# Altium PCB PCB Editable.PcbDoc
Units mm, origin at the board's own origin, x right, y up, seen from the top; angles counter-clockwise.
Board outline 39 x 29.46 mm, 2 copper layers (Top Layer, Bottom Layer); 24 components, 19 nets, 105 pads, 52 vias.
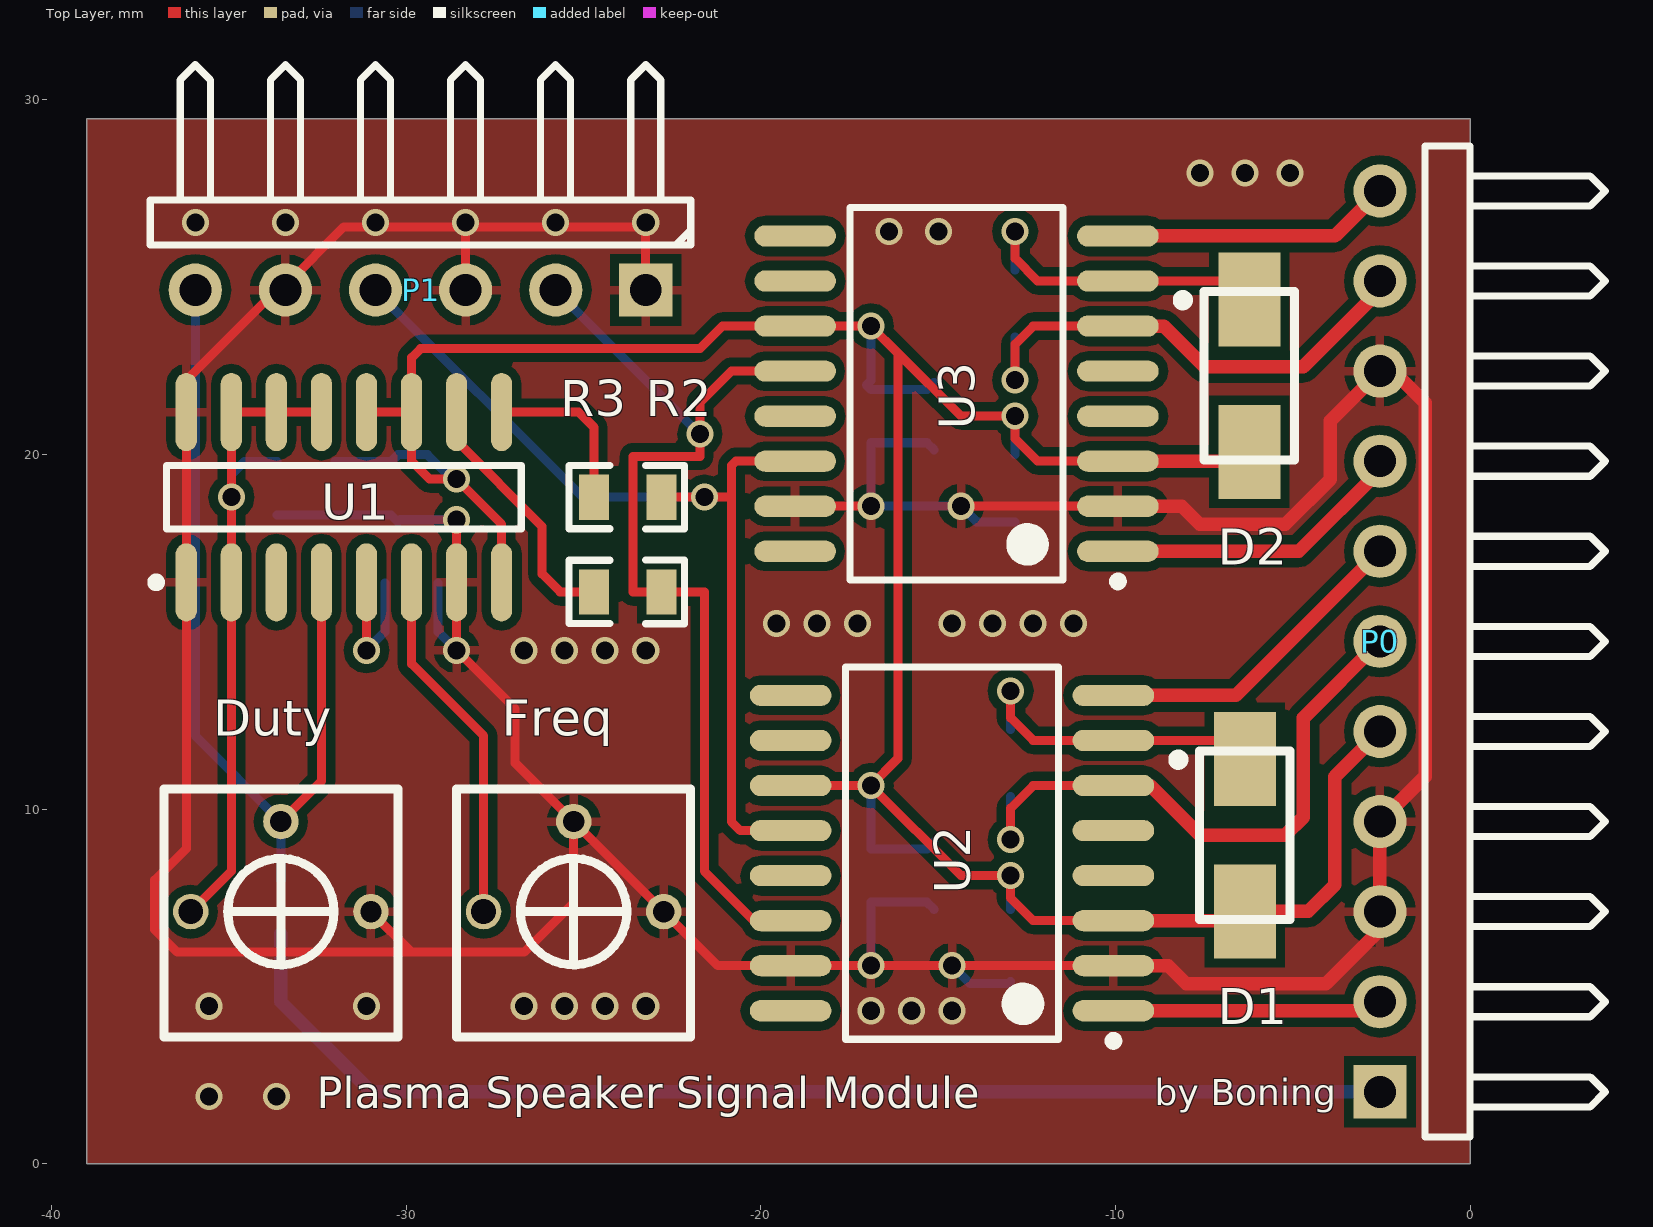
[diagram p0: Top Layer view]
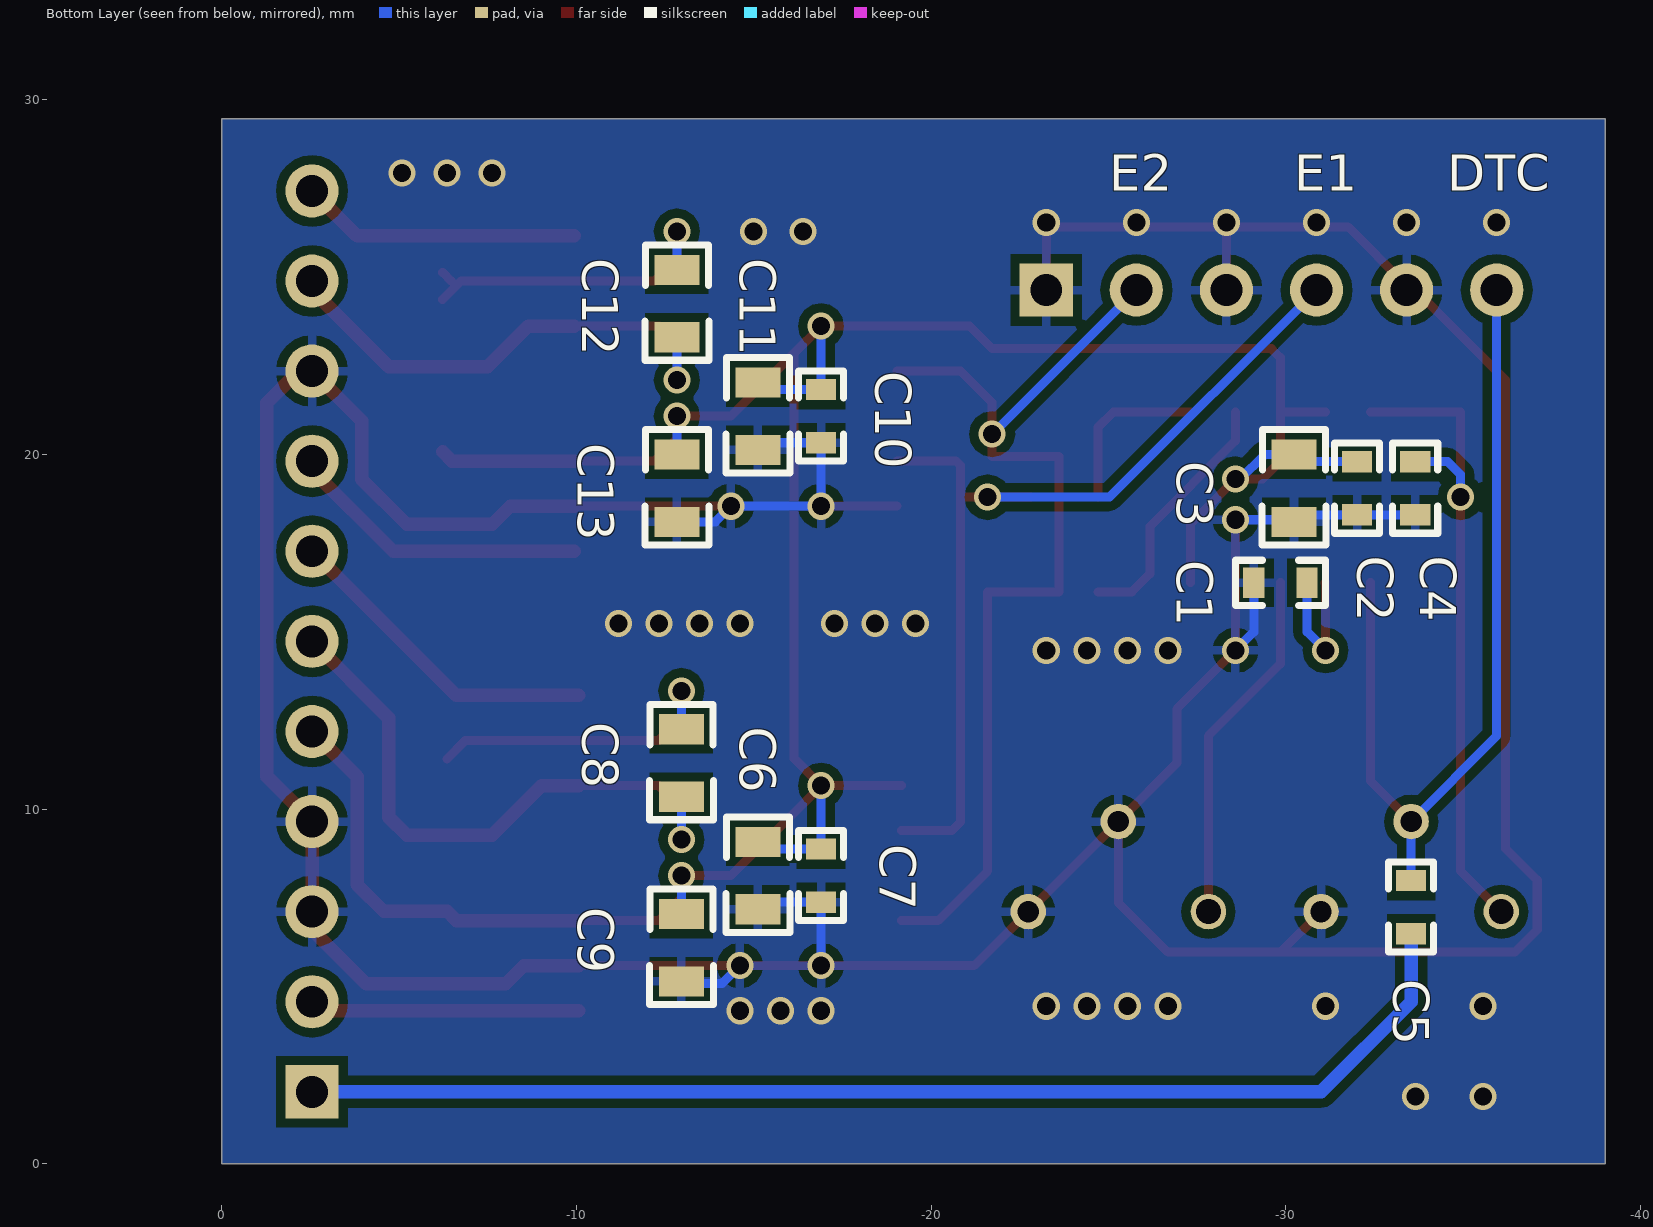
[diagram p1: Bottom Layer view, seen from below]

## Layer stack, top to bottom
Top Solder: solder mask 0.0102, Solder Resist, Dk 3.5
Top Layer: signal copper 0.0356
Dielectric 1: dielectric 0.32, FR-4, Dk 4.8
Bottom Layer: signal copper 0.0356
Bottom Solder: solder mask 0.0102, Solder Resist, Dk 3.5

## Board outline
-39,0 -39,29.464 0,29.464 0,0

## Design rules (kind name [scope] priority, off if disabled: settings)
Clearance [All] p1: gap=0.254
PolygonConnect [All] p1: connectstyle=Relief reliefconductorwidth=0.254 reliefentries=4 polygonreliefangle="90 Angle" airgapwidth=0.254
RoutingVias [All] p1: holewidth=0.711 width=1.27 viastyle="Through Hole" minholewidth=0.711 minwidth=1.27 maxholewidth=0.711 maxwidth=1.27
SolderMaskExpansion [All] p1: expansion=0.102
Width [All] p1: maxlimit=0.762 minlimit=0.254 preferedwidth=0.381
30 further rules are at their usual default settings.

## Components (designator, comment, footprint, x,y, rotation, side; value= is the part's Value field where it differs from the comment)
C1 "0603" D0603 -29.845,16.383 r180 bottom
C2 "0603" D0603 -32.004,19.05 r90 bottom
C3 "0805" D0805 -30.226,19.05 r90 bottom
C4 "0603" D0603 -33.643,19.05 r90 bottom
C5 "0603" D0603 -33.528,7.239 r90 bottom
C6 "0805" D0805 -15.113,8.128 r90 bottom
C7 "0603" D0603 -16.891,8.128 r90 bottom
C8 "0805" D0805 -12.954,11.303 r90 bottom
C9 "0805" D0805 -12.954,6.096 r90 bottom
C10 "0603" D0603 -16.891,21.082 r90 bottom
C11 "0805" D0805 -15.113,21.082 r90 bottom
C12 "0805" D0805 -12.827,24.257 r90 bottom
C13 "0805" D0805 -12.827,19.05 r90 bottom
D1 "Diode S" DO-214 -6.35,9.271 r90 top
D2 "Diode S" DO-214 -6.223,22.225 r90 top
Duty "Res Adj" RES-3362P -33.528,7.112 r0 top
Freq "Res Adj" RES-3362P -25.273,7.112 r0 top
P0 "Header 11H" HDR1X11H -2.54,2.032 r90 top
P1 "Header 6H" HDR1X6H -23.241,24.638 r180 top
R2 "0805" D0805 -23.749,18.796 r180 top
R3 "0805" D0805 -23.749,16.129 r180 top
U1 "TL494CD" 751B-05_N -31.75,18.796 r90 top
U2 "IR2110S" SOIC16_N -14.605,8.763 r180 top
U3 "IR2110S" SOIC16_N -14.478,21.717 r180 top

## Footprints (in the part's own frame and the unit in brackets; to place one, negate y for a bottom-side part, rotate by r counter-clockwise, add the part's x,y. Pads: shape width x height; smd on the part's side, far side on the other; paste and mask are expansions set on the pad)
751B-05_N [mm] "SOIC, 16-Leads, Body 9.9x3.9mm, Pitch 1.27mm, IPC Medium Density"
  oval 2.2x0.6 smd: 1(-2.4,4.445) 2(-2.4,3.175) 3(-2.4,1.905) 4(-2.4,0.635) 5(-2.4,-0.635) 6(-2.4,-1.905) 7(-2.4,-3.175) 8(-2.4,-4.445) 9(2.4,-4.445) 10(2.4,-3.175) 11(2.4,-1.905) 12(2.4,-0.635) 13(2.4,0.635) 14(2.4,1.905) 15(2.4,3.175) 16(2.4,4.445)
  silkscreen extent -2.52,-5 0.9,5.42, body extent -1.95,-4.95 1.95,4.95, height 1.75
D0603 [mm] "D0603"
  rect 0.6x0.85 smd: 1(-0.75,0) 2(0.75,0)
  silkscreen extent -1.27,-0.64 1.27,0.64, body extent -0.8,-0.4 0.8,0.4, height 0.5
D0805 [mm] "D0805"
  rect 0.85x1.27 smd: 1(-0.95,0) 2(0.95,0)
  silkscreen extent -1.6,-0.9 1.65,0.9, body extent -1,-0.64 1,0.64, height 1.25
DO-214 [mm] "DO-214"
  rect 2.65x1.75 smd: 1(-2.15,0) 2(2.15,0)
  silkscreen extent -2.37,-1.28 2.37,2.01, body extent -2.37,-1.25 2.37,1.28, height 2.2
HDR1X6H [mm] "Connector; Header; 6 Position; Right Angle"
  rect 1.5x1.5 hole 0.9: 1(0,0)
  round 1.5 hole 0.9: 2(2.54,0) 3(5.08,0) 4(7.62,0) 5(10.16,0) 6(12.7,0)
  silkscreen extent -1.27,-6.35 13.97,-1.27
HDR1X11H [mm] "Connector; Header; 11 Position; Right Angle"
  rect 1.5x1.5 hole 0.9: 1(0,0)
  round 1.5 hole 0.9: 2(2.54,0) 3(5.08,0) 4(7.62,0) 5(10.16,0) 6(12.7,0) 7(15.24,0) 8(17.78,0) 9(20.32,0) 10(22.86,0) 11(25.4,0)
  silkscreen extent -1.27,-6.35 26.67,-1.27
RES-3362P [mm] "RES-3362P"
  round 1 hole 0.7: 1(-2.54,0)
  round 1 hole 0.6: 2(0,2.54) 3(2.54,0)
  silkscreen extent -3.3,-3.53 3.3,3.46, body extent -3.3,-3.52 3.3,3.45, height 4.7
SOIC16_N [mm] "SOIC, 16-Leads, Body 10.3x7.5mm, Pitch 1.27mm, IPC Medium Density"
  oval 2.3x0.6 smd: 1(-4.55,4.445) 2(-4.55,3.175) 3(-4.55,1.905) 4(-4.55,0.635) 5(-4.55,-0.635) 6(-4.55,-1.905) 7(-4.55,-3.175) 8(-4.55,-4.445) 9(4.55,-4.445) 10(4.55,-3.175) 11(4.55,-1.905) 12(4.55,-0.635) 13(4.55,0.635) 14(4.55,1.905) 15(4.55,3.175) 16(4.55,4.445)
  silkscreen extent -4.67,-5.25 3,5.42, body extent -3.75,-5.15 3.75,5.15, height 2.65

## Part data
C1 C2 C3 C4 C5 C6 C7 C8 C9 C10 C11 C12 C13: library part Cap, "Capacitor"
D1 D2: "Zener Diode"
Duty Freq: "Resistor"
P0: "Header, 11-Pin, Right Angle"
P1: "Header, 6-Pin, Right Angle"
R2 R3: library part Res1, "Resistor"
U1: "Switchmode Pulse Width Modulation Control Circuit"
U2 U3: "High and Low Side Driver"

## Via types
v1: diameter 0.762, hole 0.508, Top Layer to Bottom Layer, tented both sides, 52 vias

## Nets (pads, with @x,y where several pads share a name; then routed paths per layer and width w, separated by ;. In a path a pad name is that pad's centre, name@x,y a point inside that pad or via, vN(x,y) a via of type N, cw(c..) or ccw(c..) an arc to the next point about the centre after c; other vN are vias at no path point)
DTC: C5.2 Duty.2 P1.6 U1.4 | length 24.9
  Top Layer w0.254: Duty.2 -32.385,10.795 U1.4
  Bottom Layer w0.254: P1.6 -35.941,12.065 Duty.2 C5.2
E1: P1.4 R2.1 U2.12 U3.14 | length 27.3
  Top Layer w0.254: R2.1 v1(-21.59,18.796) -20.828,18.796 ; U2.12 -20.574,9.398 -20.828,9.652 -20.828,18.796 ; U3.14 -20.701,19.812 -20.828,19.685 -20.828,18.796
  Bottom Layer w0.254: P1.4 -25.019,18.796 v1(-21.59,18.796)
E2: P1.2 R3.1 U2.14 U3.12 | length 28.9
  Top Layer w0.254: U2.14 -20.193,6.858 -21.59,8.255 -21.59,16.129 R3.1 -23.605,16.129 -23.605,19.939 -21.717,19.939 v1(-21.717,20.574) -21.717,21.463 -20.828,22.352 U3.12
  Bottom Layer w0.254: P1.2 v1(-21.717,20.574)
GND: C1.1 C2.1 C3.1 C4.1 C6.1 C7.1 C9.1 C10.1 C11.1 C13.1 Duty.3 Freq.2 Freq.3 P0.3 P0.4 P0.9 P1.1 P1.3 P1.5 U1.1 U1.7 U1.16 U2.2 U2.15 U3.2 U3.15 | length 140.6
  Top Layer w0.254: Duty.3 -29.845,5.969 ; v1(-28.575,18.161) U1.7 v1(-28.575,14.478) -26.924,12.827 -26.924,11.303 Freq.2 ; P1.3 v1@-28.321,26.416 ; P1.1 -23.241,26.416 v1@-28.321,26.416 ; U3.15 v1(-16.891,18.542) ; v1(-14.351,18.542) U3.2 ; U2.2 v1(-14.605,5.588) v1(-16.891,5.588) U2.15 -21.209,5.588 Freq.3 Freq.2 ; -29.845,5.969 -26.67,5.969 -25.273,7.366 Freq.2 ; -29.845,5.969 -36.449,5.969 -37.084,6.604 -37.084,8.001 -36.195,8.89 U1.1 U1.16 -36.195,22.098 -33.655,24.638 P1.5 -33.401,24.765 -31.75,26.416 v1@-28.321,26.416
  Top Layer w0.381: U2.2 -8.509,5.588 -8.001,5.08 -4.064,5.08 -2.54,6.604 P0.3 P0.4 -1.27,10.922 -1.27,21.463 -2.159,22.352 P0.9 -3.937,20.955 -3.937,19.304 -5.207,18.034 -7.62,18.034 -8.128,18.542 U3.2
  Bottom Layer w0.254: C4.1 C2.1 -30.426,18.3 C3.1 -30.165,18.161 v1(-28.575,18.161) ; C1.1 -29.095,14.998 v1(-28.575,14.478) ; v1(-16.891,5.588) C7.1 -15.313,7.378 C6.1 ; C11.1 -15.313,20.332 C10.1 v1(-16.891,18.542) v1(-14.351,18.542) -13.909,18.1 C13.1 ; v1(-14.605,5.588) -14.097,5.08 -13.02,5.08 C9.1
  other v1: -35.56,1.905 -33.655,1.905 -16.891,4.318 -15.748,4.318 -14.605,4.318 -35.56,4.445 -31.115,4.445 -26.67,4.445 -25.527,4.445 -24.384,4.445 -23.241,4.445 -26.67,14.478 -25.527,14.478 -24.384,14.478 -23.241,14.478 -19.558,15.24 -18.415,15.24 -17.272,15.24 -14.605,15.24 -13.462,15.24 -12.319,15.24 -11.176,15.24 -16.383,26.289 -14.986,26.289 -35.941,26.543 -33.401,26.543 -30.861,26.543 -28.321,26.543 -25.781,26.543 -23.241,26.543 -7.62,27.94 -6.35,27.94 -5.08,27.94
HG1: P0.7 U2.8 | length 9.2
  Top Layer w0.381: U2.8 -6.604,13.208 P0.7
HG2: P0.11 U3.8 | length 7.9
  Top Layer w0.381: U3.8 -3.81,26.162 P0.11
HS1: C8.1 P0.6 U2.6 | length 17.3
  Top Layer w0.254: v1(-12.954,9.144) -12.954,10.033 -12.319,10.668 U2.6
  Top Layer w0.381: U2.6 -9.017,10.668 -7.62,9.271 -5.207,9.271 -4.699,9.779 -4.699,12.573 P0.6
  Bottom Layer w0.254: v1(-12.954,9.144) C8.1
HS2: C12.1 P0.10 U3.6 | length 14.3
  Top Layer w0.254: v1(-12.827,22.098) -12.827,23.114 -12.319,23.622 U3.6
  Top Layer w0.381: U3.6 -8.636,23.622 -7.493,22.479 -4.699,22.479 -2.54,24.638 P0.10
  Bottom Layer w0.254: v1(-12.827,22.098) C12.1
LG1: P0.2 U2.1 | length 7.6
  Top Layer w0.381: U2.1 -2.794,4.318 P0.2
LG2: P0.8 U3.1 | length 8.6
  Top Layer w0.381: U3.1 -4.826,17.272 -2.54,19.558 P0.8
MIDI: C5.1 P0.1 | length 34
  Bottom Layer w0.381: C5.1 -33.528,4.572 -30.988,2.032 P0.1
NetC1_2: C1.2 U1.5 | length 4
  Top Layer w0.254: v1(-31.115,14.478) -31.115,16.372 -31.103,16.384 U1.5
  Bottom Layer w0.254: v1(-31.115,14.478) -30.595,14.998 C1.2
NetC8_2: C8.2 D1.2 U2.7 | length 8.9
  Top Layer w0.254: v1(-12.954,13.335) -12.954,12.573 -12.319,11.938 U2.7 -6.867,11.938 D1.2
  Bottom Layer w0.254: C8.2 v1(-12.954,13.335)
NetC12_2: C12.2 D2.2 U3.7 | length 9.3
  Top Layer w0.254: v1(-12.827,26.289) -12.827,25.527 -12.192,24.892 U3.7 -6.74,24.892 D2.2 ; D2.2@-6.468,24.892 D2.2@-6.223,25.137
  Bottom Layer w0.254: C12.2 v1(-12.827,26.289)
NetFreq_1: Freq.1 U1.6 | length 10.1
  Top Layer w0.254: U1.6 -29.845,14.097 -27.813,12.065 Freq.1
NetR2_2: R2.2 U1.9 | length 4.8
  Top Layer w0.254: U1.9 -25.133,21.196 -24.699,20.762 R2.2
NetR3_2: R3.2 U1.10 | length 7.2
  Top Layer w0.254: U1.10 -28.575,20.382 -26.162,17.969 -26.162,16.637 -25.654,16.129 R3.2
VCC: C2.2 C3.2 C6.2 C7.2 C9.2 C10.2 C11.2 C13.2 D1.1 D2.1 P0.5 U1.8 U1.11 U1.12 U2.3 U2.11 U3.3 U3.11 | length 83.5
  Top Layer w0.254: U1.12 U1.11 ; U1.8 -27.305,18.034 v1(-28.575,19.304) -29.337,19.304 -29.845,19.812 U1.11 ; U2.11 v1(-16.891,10.668) ; U2.3 -12.319,6.858 -12.954,7.493 v1(-12.954,8.128) -14.351,8.128 v1(-16.891,10.668) ; U3.3 -12.192,19.812 -12.827,20.447 v1(-12.827,21.082) -14.351,21.082 -16.129,22.86 ; U1.11 -29.845,22.733 -29.591,22.987 -21.717,22.987 -21.082,23.622 U3.11 v1(-16.891,23.622) -16.129,22.86 ; v1(-16.891,10.668) -16.129,11.43 -16.129,22.86
  Top Layer w0.381: U2.3 -6.613,6.858 D1.1 -4.563,7.121 -3.81,7.874 -3.81,10.922 P0.5 ; U3.3 -6.486,19.812 D2.1
  Bottom Layer w0.254: C2.2 -30.426,19.8 C3.2 -29.398,20 -28.702,19.304 v1(-28.575,19.304) ; v1(-16.891,10.668) C7.2 -15.313,8.878 C6.2 ; v1(-16.891,23.622) -16.891,22.086 -17.018,21.959 C10.2 -15.313,21.832 C11.2 ; C9.2@-12.954,7.173 v1(-12.954,8.128) ; C13.2 v1(-12.827,21.082)
VREF: C4.2 Duty.1 U1.2 U1.13 U1.14 U1.15 | length 19.2
  Top Layer w0.254: Duty.1 -34.925,8.255 U1.2 v1(-34.925,18.796) U1.15 U1.14 U1.13
  Bottom Layer w0.254: v1(-34.925,18.796) -34.925,19.431 -34.556,19.8 C4.2
pads on no net: U1.3 U2.4 U2.5 U2.9 U2.10 U2.13 U2.16 U3.4 U3.5 U3.9 U3.10 U3.13 U3.16

## Polygon pours and split planes (outlines as drawn)
GND on Bottom Layer "Top Overlay-No Net" (solid, remove dead copper, pour order 2): 0,0 -38.989,0 -38.989,29.464 0,29.464
GND on Top Layer "Top Overlay-No Net" (solid, remove dead copper, pour order 0): 0,0 -38.989,0 -38.989,29.464 0,29.464

## Silkscreen, mask and mechanical layers (free items; w line width, h text height)
Top Overlay:
  text "by Boning" at -8.89,1.397 h1.27
  text "Plasma Speaker Signal Module" at -32.512,1.27 h1.52
Bottom Overlay:
  text "DTC" at -34.544,27.432 h1.02
  text "E1" at -30.226,27.432 h1.02
  text "E2" at -25.019,27.432 h1.02
Mechanical 5:
  the board outline again, w0.254